# Altium PCB PCB1.PcbDoc (part 1 of 2)
Units mm, origin at the board's own origin, x right, y up, seen from the top; angles counter-clockwise.
Board outline 42.67 x 97.28 mm, 2 copper layers (Top Layer, Bottom Layer); 89 components, 66 nets, 314 pads, 101 vias.
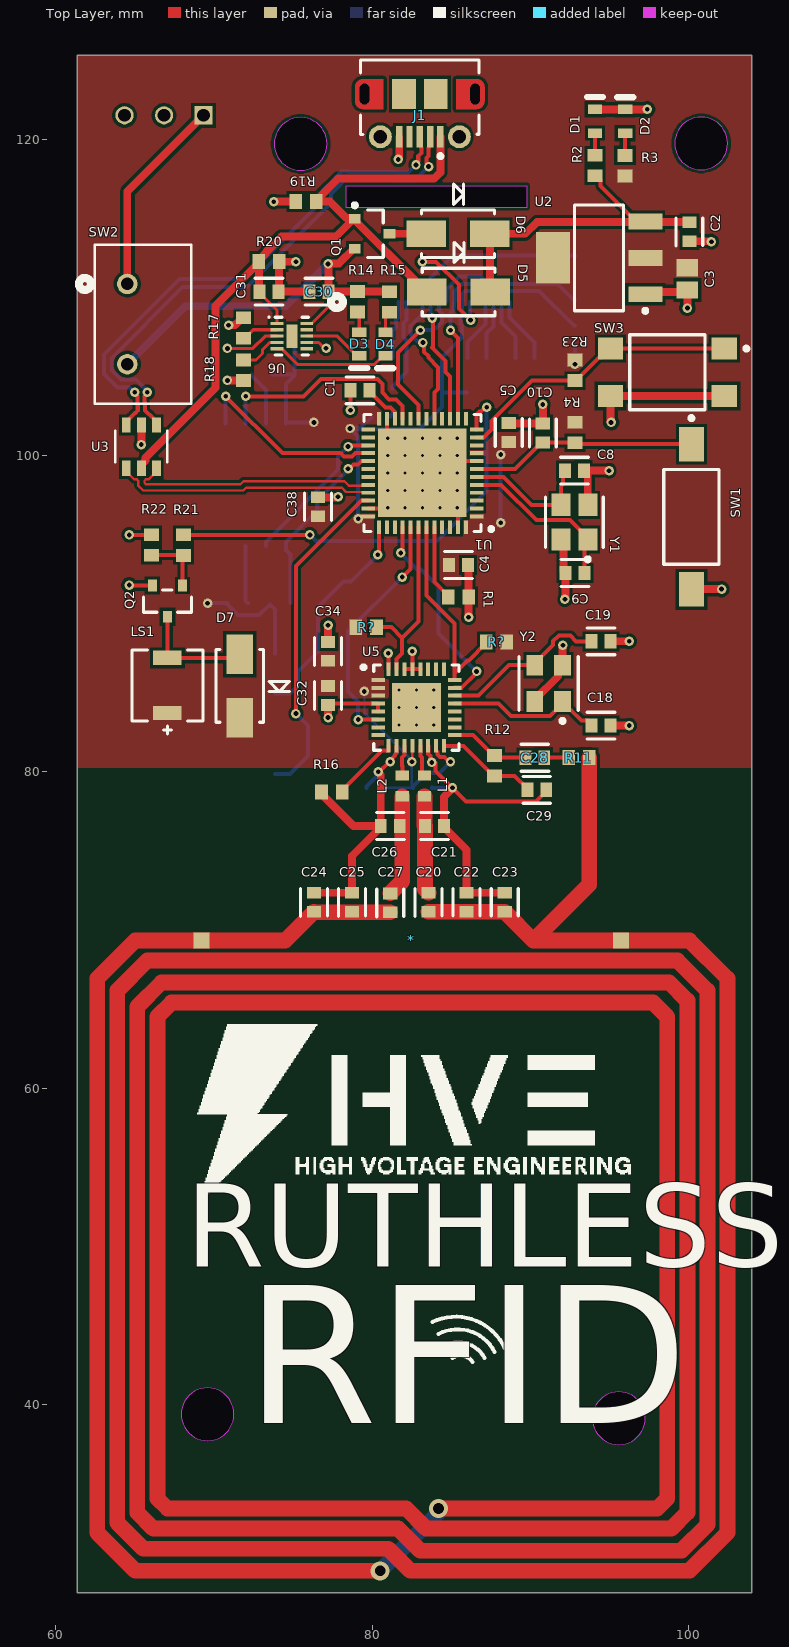
[diagram p0: Top Layer view]
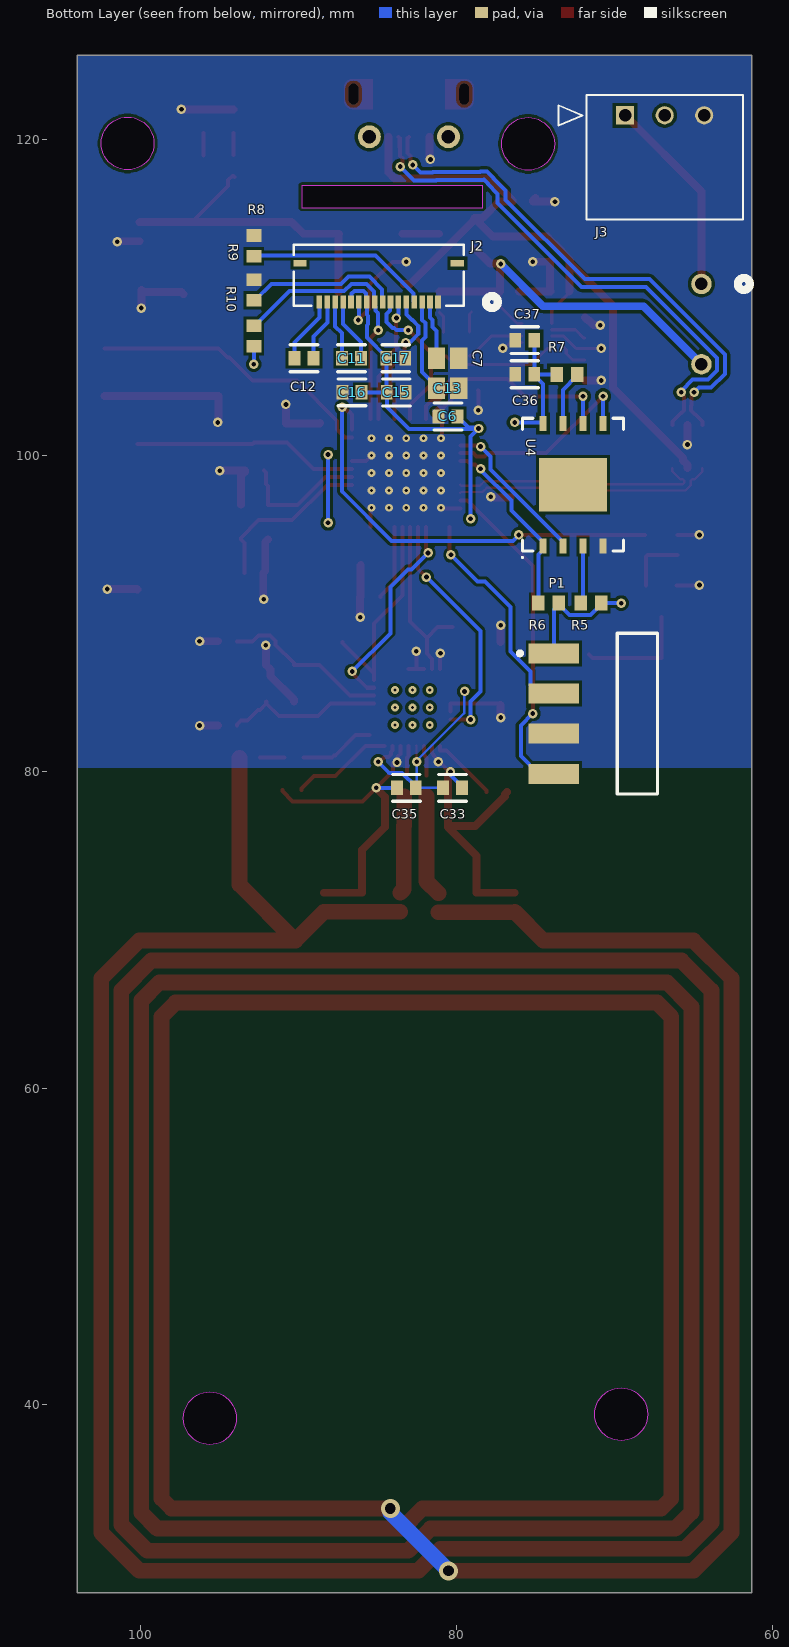
[diagram p1: Bottom Layer view, seen from below]
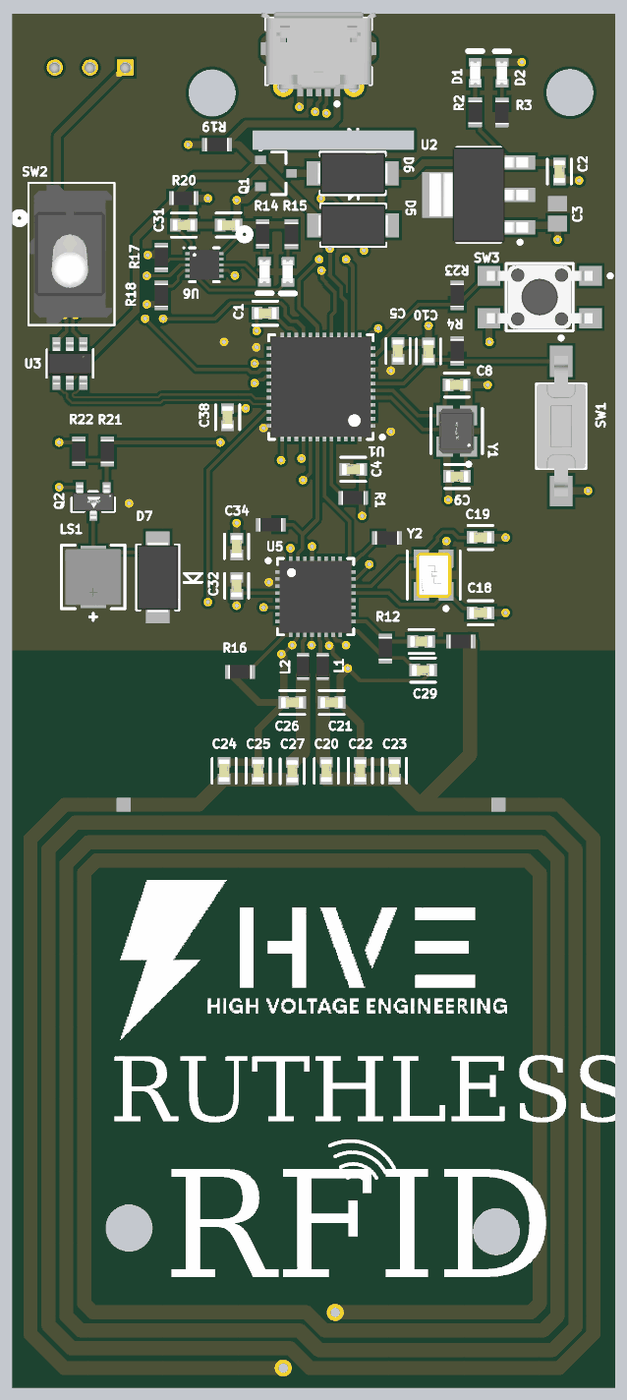
[diagram p2: 3D render of the assembled board from above, using the file's embedded part models]
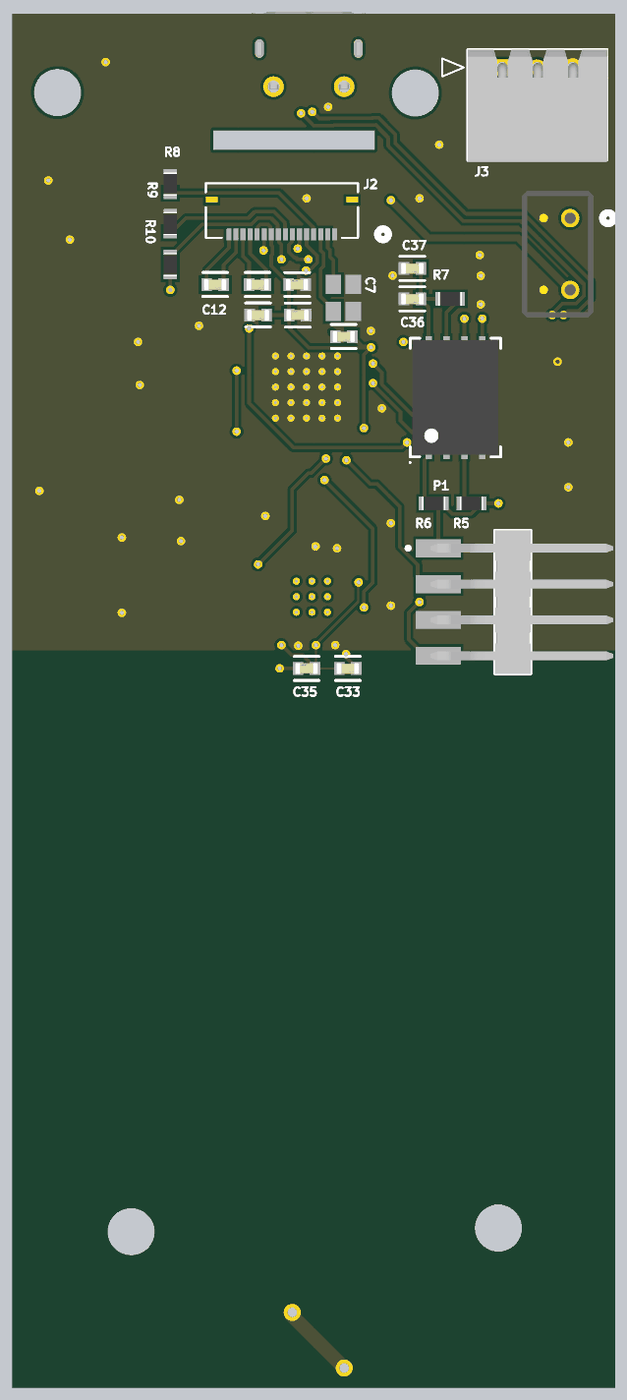
[diagram p3: 3D render of the assembled board from below, using the file's embedded part models]

## Layer stack, top to bottom
Top Solder: solder mask 0.0102, Solder Resist, Dk 3.5
Top Layer: signal copper 0.0356
Dielectric 1: dielectric 0.32, FR-4, Dk 4.8
Bottom Layer: signal copper 0.0356
Bottom Solder: solder mask 0.0102, Solder Resist, Dk 3.5

## Board outline
61.341,28.064 61.341,125.349 104.013,125.349 104.013,28.064
cut-out: 99.148,119.761 ccw(c100.819,119.761) 100.819,118.091 ccw(c100.819,119.761) 102.489,119.761 ccw(c100.819,119.761) 100.819,121.431 ccw(c100.819,119.761)
cut-out: 73.811,119.732 ccw(c75.482,119.732) 75.482,118.061 ccw(c75.482,119.732) 77.152,119.732 ccw(c75.482,119.732) 75.482,121.402 ccw(c75.482,119.732)
cut-out: 67.926,39.37 ccw(c69.596,39.37) 69.596,37.7 ccw(c69.596,39.37) 71.266,39.37 ccw(c69.596,39.37) 69.596,41.04 ccw(c69.596,39.37)
cut-out: 93.941,39.116 ccw(c95.612,39.116) 95.612,37.446 ccw(c95.612,39.116) 97.282,39.116 ccw(c95.612,39.116) 95.612,40.786 ccw(c95.612,39.116)
cut-out: 78.359,115.697 78.359,117.094 89.789,117.094 89.789,115.697

## Design rules (kind name [scope] priority, off if disabled: settings)
Clearance [All] p1: gap=0.2 ignorepadtopadclearanceinfootprint=FALSE except(0: Arc-Hole Track-Hole SMDPad-Hole THPad-Hole Via-Hole Fill-Hole Poly-Hole Region-Hole Text-Hole; 0.1: SMDPad-SMDPad; 0.15: Arc-SMDPad Track-SMDPad)
DiffPairsRouting [All] p1: maxlimit=0.254 minlimit=0.1 mostfreqgap=0.254 toplayer_minwidth=0.1 toplayer_maxwidth=0.381 toplayer_prefwidth=0.254 bottomlayer_minwidth=0.1 bottomlayer_maxwidth=0.381 bottomlayer_prefwidth=0.254 maxuncoupledlength=12.7
MinimumSolderMaskSliver [All] p1: minsoldermaskwidth=0.1
PlaneConnect [All] p1: planeconnectstyle=Direct reliefexpansion=0.508 reliefentries=4 reliefconductorwidth=0.254 reliefairgap=0.254
PolygonConnect [All] p1: connectstyle=Direct reliefconductorwidth=0.254 reliefentries=4 polygonreliefangle="90 Angle" airgapwidth=0.254
RoutingVias [All] p1: holewidth=0.3 width=0.6 viastyle="Through Hole" minholewidth=0.3 minwidth=0.6 maxholewidth=0.3 maxwidth=0.6
SilkToSolderMaskClearance [IsPad] p1: minsilkscreentomaskgap=0.1 clearancetoexposedcopper=TRUE
SolderMaskExpansion [All] p1: expansion=0 istentingtop=FALSE
Width [All] p1: maxlimit=10 minlimit=0.15 preferedwidth=0.254 minimp=50.000000 maximp=50.000000 favimp=50.000000
26 further rules are at their usual default settings.

## Classes and differential pairs
component class "RFID Sheet2": * C18 C19 C20 C21 C22 C23 C24 C25 C26 C27 C28 C29 C30 C31 C32 C33 C34 C35 D3 D4 D5 D6 D7 L1 L2 LS1 Q1 Q2 R11 R12 R14 R15 R16 R17 R18 R19 R20 R21 R22 R? U5 U6 Y2
component class "RFID Sheet 1": C1 C2 C3 C4 C5 C6 C7 C8 C9 C10 C11 C12 C13 C15 C16 C17 C36 C37 C38 D1 D2 J1 J2 J3 P1 R1 R2 R3 R4 R5 R6 R7 R8 R9 R10 R23 SW1 SW2 SW3 U1 U2 U3 U4 Y1
differential pair USB: +USB_P -USB_N
differential pair USB_CONN: +USB_CONN_P -USB_CONN_N

## Components (designator, comment, footprint, x,y, rotation, side; value= is the part's Value field where it differs from the comment)
* "RFID COIL" PCBComponent_1 82.55,49.403 r270 top
C1 "2.2u" FP-C0603C-CF-MFG 79.248,104.14 r180 top value="0.10 μF"
C2 "0.1u" FP-C0603C-CF-MFG 100.076,114.173 r270 top value="0.10 μF"
C3 "10u" CAPC2013X88X50LL20T25 99.949,111.19 r90 top
C4 "0.1u" FP-C0603C-CF-MFG 85.471,93.091 r0 top value="0.10 μF"
C5 "0.1u" FP-C0603C-CF-MFG 88.646,101.473 r90 top value="0.10 μF"
C6 "0.1u" FP-C0603C-CF-MFG 80.553,102.489 r0 bottom value="0.10 μF"
C7 "10u" CAPC2013X88X50LL20T25 80.58,106.172 r0 bottom
C8 "26p" FP-C0603C-CF-MFG 92.802,99.06 r0 top value="0.10 μF"
C9 "26p" FP-C0603C-CF-MFG 92.837,92.583 r180 top value="0.10 μF"
C10 "0.1u" FP-C0603C-CF-MFG 90.805,101.438 r90 top value="0.10 μF"
C11 "1u" FP-C0603C-CF-MFG 86.649,106.172 r0 bottom value="0.10 μF"
C12 "1u" FP-C0603C-CF-MFG 89.662,106.172 r0 bottom value="0.10 μF"
C13 "10u" CAPC2013X88X50LL20T25 80.58,104.267 r0 bottom
C15 "0.1u" FP-C0603C-CF-MFG 83.82,104.013 r180 bottom value="0.10 μF"
C16 "0.1u" FP-C0603C-CF-MFG 86.614,104.013 r0 bottom value="0.10 μF"
C17 "0.1u" FP-C0603C-CF-MFG 83.855,106.172 r180 bottom value="0.10 μF"
C18 "31p" FP-C0603C-CF-MFG 94.488,82.931 r0 top value="0.10 μF"
C19 "31p" FP-C0603C-CF-MFG 94.488,88.265 r0 top value="0.10 μF"
C20 "15p" FP-C0603C-CF-MFG 83.566,71.755 r270 top value="0.10 μF"
C21 "47p" FP-C0603C-CF-MFG 83.947,76.581 r0 top value="0.10 μF"
C22 "180p" FP-C0603C-CF-MFG 85.979,71.755 r90 top value="0.10 μF"
C23 "10p" FP-C0603C-CF-MFG 88.392,71.755 r90 top value="0.10 μF"
C24 "180p" FP-C0603C-CF-MFG 76.327,71.755 r270 top value="0.10 μF"
C25 "10p" FP-C0603C-CF-MFG 78.74,71.755 r270 top value="0.10 μF"
C26 "47p" FP-C0603C-CF-MFG 81.153,76.581 r0 top value="0.10 μF"
C27 "15p" FP-C0603C-CF-MFG 81.153,71.72 r270 top value="0.10 μF"
C28 "0.1u" FP-C0603C-CF-MFG 90.297,80.899 r0 top value="0.10 μF"
C29 "0.1u" FP-C0603C-CF-MFG 90.424,78.867 r180 top value="0.10 μF"
C30 "1u" FP-C0603C-CF-MFG 76.652,110.382 r180 top value="0.10 μF"
C31 "1u" FP-C0603C-CF-MFG 73.477,110.382 r0 top value="0.10 μF"
C32 "0.1u" FP-C0603C-CF-MFG 77.216,84.836 r90 top value="0.10 μF"
C33 "0.1u" FP-C0603C-CF-MFG 80.264,78.994 r0 bottom value="0.10 μF"
C34 "0.1u" FP-C0603C-CF-MFG 77.216,87.63 r270 top value="0.10 μF"
C35 "0.1u" FP-C0603C-CF-MFG 83.185,78.994 r180 bottom value="0.10 μF"
C36 "0.1u" FP-C0603C-CF-MFG 75.692,105.156 r0 bottom value="0.10 μF"
C37 "0.1u" FP-C0603C-CF-MFG 75.692,107.315 r0 bottom value="0.10 μF"
C38 "0.1u" FP-C0603C-CF-MFG 76.581,96.774 r90 top value="0.10 μF"
D1 "0603 LED" "0603 LED" 94.107,121.17 r90 top
D2 "0603 LED" "0603 LED" 96.012,121.158 r90 top
D3 "0603 LED" "0603 LED" 79.192,107.08 r270 top
D4 "0603 LED" "0603 LED" 80.843,107.068 r270 top
D5 "B260A-13-F" DIOD-SMA-2_V 85.471,110.363 r0 top
D6 "B260A-13-F" DIOD-SMA-2_V 85.439,114.046 r0 top
D7 "B260A-13-F" DIOD-SMA-2_V 71.628,85.439 r270 top
J1 "105017-0001" USB-MICRO-B_V 83.024,121.532 r180 top
J2 "16 pin 0.5mm pitch FPC" CONN16_046809616210846+_AVX 81.185,109.728 r0 bottom
J3 "22057035" CON_22057035_MOL 69.342,121.539 r180 bottom
L1 "2.2u" INDC1608X90X30LL10T20 83.312,79.121 r270 top
L2 "2.2u" INDC1608X90X30LL10T20 81.915,79.121 r270 top
LS1 "SMT-0440-S-R" FP-SMT-0440-S-R-MFG 67.056,85.471 r270 top
P1 "TSM-104-01-T-SH" SMTC-TSM-104-01-X-SH 68.453,83.693 r270 bottom
Q1 "BSS308PE" INF-PG-SOT23_L 80.01,114.046 r0 top
Q2 "SQ2364EES-T1_GE3" FP-S-03946-MFG 67.056,90.805 r270 top
R1 "10k" RESC1609X50X30NL8T20 85.471,91.059 r0 top
R2 "520" RESC1609X50X30NL8T20 94.107,118.364 r270 top
R3 "100" RESC1609X50X30NL8T20 96.012,118.349 r270 top
R4 "10k" RESC1609X50X30NL8T20 92.837,101.473 r270 top
R5 "10k" RESC1609X50X30NL8T20 71.501,90.678 r180 bottom
R6 "4.7k" RESC1609X50X30NL8T20 74.183,90.678 r180 bottom
R7 "10k" RESC1609X50X30NL8T20 73.025,105.156 r0 bottom
R8 "680k" RESC1609X50X30NL8T20 92.837,113.284 r90 bottom
R9 "5.1k" RESC1609X50X30NL8T20 92.837,110.49 r90 bottom
R10 "4.7k" RESC1609X50X30NL8T20 92.837,107.584 r270 bottom
R11 "5.1k" RESC1609X50X30NL8T20 93.091,80.899 r0 top
R12 "820" RESC1609X50X30NL8T20 87.757,80.391 r90 top
R14 "1k5" RESC1609X50X30NL8T20 79.065,109.747 r90 top
R15 "1k5" RESC1609X50X30NL8T20 81.097,109.732 r90 top
R16 "10k" RESC1609X50X30NL8T20 77.455,78.74 r0 top
R17 "1k3" RESC1609X50X30NL8T20 71.882,108.092 r270 top
R18 "2k" RESC1609X50X30NL8T20 71.882,105.41 r90 top
R19 "10k" RESC1609X50X30NL8T20 75.819,116.078 r0 top
R20 "10k" RESC1609X50X30NL8T20 73.477,112.287 r180 top
R21 "10" RESC1609X50X30NL8T20 68.072,94.346 r90 top
R22 "10k" RESC1609X50X30NL8T20 66.04,94.361 r270 top
R23 "10k" RESC1609X50X30NL8T20 92.837,105.41 r90 top
R? "10k" RESC1609X50X30NL8T20 87.866,88.224 r0 top
R? "10k" RESC1609X50X30NL8T20 79.629,89.154 r180 top
SW1 "FSMSMTR" TECO-FSMSMTR_V 100.203,96.139 r270 top
SW2 "A11JP" A11JP_NKK 64.516,110.871 r0 top
SW3 "TL3305AF260QG" FP-TL3305AF260QG-MFG 98.679,105.283 r180 top
U1 "STM32F401CBU6TR" "UQFN48 P0.5mm" 83.189,98.913 r180 top
U2 "LD1117S33TR" SOT230P700X180-4N 94.361,112.522 r180 top
U3 "USBLC6-2SC6" SOT23-6L_STM 65.405,100.584 r270 top
U4 "W25N01GVZEIG TR" "WSON 8mmx6mm 1.27P" 72.644,98.171 r90 bottom
U5 "MFRC52201HN1,157" "32QFN P0.5" 82.804,84.074 r0 top
U6 "BQ24040DSQR" SON40P200X80_HS-11N 74.93,107.569 r0 top
Y1 "ABM8G-16.000MHZ-18-D2Y-T" FP-ABM8G-MFG 92.798,95.801 r90 top
Y2 "ABM8-27.120MHZ-B4-T" FP-ABM8-MFG 91.172,85.605 r90 top

## Footprints (in the part's own frame and the unit in brackets; to place one, negate y for a bottom-side part, rotate by r counter-clockwise, add the part's x,y. Pads: shape width x height; smd on the part's side, far side on the other; paste and mask are expansions set on the pad)
"32QFN P0.5" [mm] "QFN, 32-Leads, Body 5.00x5.00mm, Pitch 0.50mm, Thermal Pad 3.10x3.10mm, IPC Medium Density"
  rect 0.85x0.25 smd: 1(-2.425,1.75) 2(-2.425,1.25) 3(-2.425,0.75) 4(-2.425,0.25) 5(-2.425,-0.25) 6(-2.425,-0.75) 7(-2.425,-1.25) 8(-2.425,-1.75) 17(2.425,-1.75) 18(2.425,-1.25) 19(2.425,-0.75) 20(2.425,-0.25) 21(2.425,0.25) 22(2.425,0.75) 23(2.425,1.25) 24(2.425,1.75)
  rect 0.25x0.85 smd: 9(-1.75,-2.425) 10(-1.25,-2.425) 11(-0.75,-2.425) 12(-0.25,-2.425) 13(0.25,-2.425) 14(0.75,-2.425) 15(1.25,-2.425) 16(1.75,-2.425) 25(1.75,2.425) 26(1.25,2.425) 27(0.75,2.425) 28(0.25,2.425) 29(-0.25,2.425) 30(-0.75,2.425) 31(-1.25,2.425) 32(-1.75,2.425)
  rect 3.1x3.1 smd: 33(0,0)
  silkscreen extent -3.47,-2.7 2.7,2.7, body extent -2.55,-2.55 2.55,2.55, height 1
"0603 LED" [mm]
  rect 0.6x0.9 smd: 1(-0.75,0) 2(0.75,0)
  silkscreen extent 1.52,-0.51 1.52,0.51, body extent -0.84,-0.37 0.81,0.36, height 0.68
A11JP_NKK [mil]
  round 51 / inner round 60 / far side round 51 hole 31 paste-99999 mask+0: 1(0,0) 3(0,-200)
  silkscreen extent -121,-298 159,98, body extent -77,-293 153,93, height 719
CAPC2013X88X50LL20T25 [mm] "Chip Capacitor, 2-Leads, Body 2.00x1.25mm, IPC High Density"
  rect 1.1x1.35 smd: 1(-0.7,0) 2(0.7,0)
  body extent -1.1,-0.72 1.1,0.72, height 0.88
CON_22057035_MOL [mm]
  rect 1.15x1.15 / inner round 1.524 / far side rect 1.15x1.15 hole 0.8 paste-2539.97 mask+0.076: 1(0,0)
  round 1.15 / inner round 1.524 / far side round 1.15 hole 0.8 paste-2539.97 mask+0.076: 2(2.5,0) 3(5,0)
  silkscreen extent -4.23,-6.6 7.45,1.3, body extent -2.41,-6.63 7.49,1.27, height 4.99
CONN16_046809616210846+_AVX [mil]
  rect 14x33 smd paste+0 mask+0: 1(0,0) 2(19.69,0) 3(39.37,0) 4(59.06,0) 5(78.74,0) 6(98.43,0) 7(118.11,0) 8(137.8,0) 9(157.48,0) 10(177.17,0) 11(196.85,0) 12(216.54,0) 13(236.22,0) 14(255.91,0) 15(275.59,0) 16(295.28,0)
  rect 33x16 smd paste-16.5 mask+0: 17(-48.23,-96.46) 18(343.5,-96.46)
  silkscreen extent -149,-142 360,15
DIOD-SMA-2_V [mm]
  rect 2.5x1.7 smd: 1(-2,0) 2(2,0)
  silkscreen extent -2.3,-1.5 2.3,3.14, body extent -2.52,-1.46 2.52,1.46, height 2.4
FP-ABM8-MFG [mm]
  rect 1.3x1.05 smd paste+0 mask+0: 1(-1.15,-0.875) 2(1.15,-0.875) 3(1.15,0.875) 4(-1.15,0.875)
  silkscreen extent -2.5,-1.88 1.7,1.88, body extent -1.9,-1.5 1.9,1.5, height 0.25
FP-ABM8G-MFG [mm]
  rect 1.4x1.2 smd paste+0 mask+0: 1(-1.1,-0.85) 2(1.1,-0.85) 3(1.1,0.85) 4(-1.1,0.85)
  silkscreen extent -2.47,-1.83 1.6,1.83, body extent -1.9,-1.55 1.9,1.55, height 0.25
FP-C0603C-CF-MFG [mm]
  rect 0.75x0.9 smd paste+0 mask+0: 1(-0.6,0) 2(0.6,0)
  silkscreen extent -0.87,-0.85 0.88,0.85, body extent -1.2,-0.6 1.2,0.6, height 0.25
FP-S-03946-MFG [mil]
  rect 29x22 smd paste+0 mask+0: 1(-39,37.5) 2(-39,-37.5) 3(39,0)
  silkscreen extent -28,-60 28,60, body extent -57,-64 57,64, height 10
FP-SMT-0440-S-R-MFG [mm]
  rect 0.9x1.8 smd paste+0 mask+0: 1(-1.75,0) 2(1.75,0)
  silkscreen extent -2.25,-2.25 3.08,2.25, body extent -2.35,-2.35 2.35,2.35, height 0.25
FP-TL3305AF260QG-MFG [mm]
  rect 1.6x1.4 smd paste+0 mask+0: 1(-3.6,-1.5) 2(3.6,-1.5) 3(-3.6,1.5) 4(3.6,1.5)
  silkscreen extent -5.13,-2.37 2.37,2.37, body extent -4.5,-2.47 4.5,2.47, height 0.25
INDC1608X90X30LL10T20 [mm] "Chip Inductor, 2-Leads, Body 1.7x0.9mm, IPC High Density"
  rect 0.64x0.84 smd: 1(-0.66,0) 2(0.66,0)
  body extent -0.85,-0.45 0.85,0.45, height 0.9
INF-PG-SOT23_L [mm] "SOT23, 3-Leads, Body 2.9x1.3mm, Pitch 0.95mm, IPC High Density"
  rect 0.75x0.6 smd: 1(-1.1,0.95) 2(-1.1,-0.95) 3(1.1,0)
  silkscreen extent -1.22,-1.5 0.7,1.92, body extent -0.7,-1.5 0.7,1.5, height 1.1
PCBComponent_1 [mm]
  rect 1x1 smd mask-1: 1(-19.939,13.208) 2(-19.939,-13.335)
  Top Layer lines w1: -19.939,-13.335 -19.939,-17.526 -17.526,-19.939 0,-19.939 17.526,-19.939 19.939,-17.526 19.939,-2.032 ; 16.002,1.651 16.002,15.494 15.367,16.129 -15.113,16.129 -16.002,15.24 -16.002,-15.24 -15.113,-16.129 15.367,-16.129 16.002,-15.494 16.002,-0.381 17.272,0.889 17.272,1.397 17.272,16.383 16.256,17.399 -16.129,17.399 -17.272,16.256 -17.272,-15.875 -15.748,-17.399 16.256,-17.399 17.272,-16.383 17.272,-0.889 18.669,0.508 18.669,17.018 17.018,18.669 -16.764,18.669 -18.669,16.764 -18.669,-16.764 -16.764,-18.669 16.891,-18.669 18.542,-17.018 18.542,-1.524 19.939,-0.127 19.939,0 19.939,17.526 17.526,19.939 0,19.939 -17.526,19.939 -19.939,17.526 -19.939,13.208
  Bottom Layer lines w1: 19.939,-2.032 16.256,1.651 16.002,1.651
RESC1609X50X30NL8T20 [mm] "Chip Resistor, 2-Leads, Body 1.65x0.95mm, IPC Medium Density"
  rect 0.8x0.95 smd: 1(-0.65,0) 2(0.65,0)
  body extent -0.82,-0.48 0.82,0.48, height 0.5
SMTC-TSM-104-01-X-SH [mm] "Terminal Strip Single Surface Mount, 1x4 Pins, Horizontal, 2.54mm Pitch, Male"
  rect 1.27x3.18 smd: 1(-3.81,-5.402) 2(-1.27,-5.402) 3(1.27,-5.402) 4(3.81,-5.402)
  silkscreen extent -5.08,-7.67 5.08,1.15, body extent -5.08,-5.96 5.08,6.99, height 3.05
SON40P200X80_HS-11N [mm] "SON, 10-Leads, Body 2.00x2.00mm, Pitch 0.40mm, Thermal Pad 1.50x0.69mm, IPC Medium Density"
  rect 0.8x0.2 smd: 1(-0.945,0.8) 2(-0.945,0.4) 3(-0.945,0) 4(-0.945,-0.4) 5(-0.945,-0.8) 6(0.945,-0.8) 7(0.945,-0.4) 8(0.945,0) 9(0.945,0.4) 10(0.945,0.8)
  rect 0.69x1.5 smd: 11(0,0)
  silkscreen extent -1.5,-1.2 1.05,1.25, body extent -1.05,-1.05 1.05,1.05, height 0.8
SOT23-6L_STM [mil]
  rect 38.5x22 smd paste+0 mask+0: 1(-53.75,37.4) 2(-53.75,0) 3(-53.75,-37.4) 4(53.75,-37.4) 5(53.75,0) 6(53.75,37.4)
  silkscreen extent -40,-65 40,65, body extent -59,-60 59,60, height 57
SOT230P700X180-4N [mm] "SOT223, 4-Leads, Body 6.50x7.00mm (avg), Pitch 2.30mm, IPC Medium Density"
  rect 2.15x1 smd: 1(-2.925,2.3) 2(-2.925,0) 3(-2.925,-2.3)
  rect 2.15x3.25 smd: 4(2.925,0)
  silkscreen extent -3.05,-3.35 1.55,3.47, body extent -3.5,-3.35 3.5,3.35, height 1.8
TECO-FSMSMTR_V [mm] "SMD, 2-Leads, Body 6x3.5mm, Pitch 9.19mm"
  rect 2.2x1.6 smd: 1(-4.595,0)
  rect 2.18x1.6 smd: 2(4.595,0)
  silkscreen extent -6.37,-1.75 3,1.75, body extent -4.98,-1.75 4.98,1.75, height 4.4
"UQFN48 P0.5mm" [mm] "QFN, 48-Leads, Body 7.00x7.00mm, Pitch 0.50mm, Thermal Pad 5.60x5.60mm, IPC Medium Density"
  rect 0.85x0.25 smd: 1(-3.425,2.75) 2(-3.425,2.25) 3(-3.425,1.75) 4(-3.425,1.25) 5(-3.425,0.75) 6(-3.425,0.25) 7(-3.425,-0.25) 8(-3.425,-0.75) 9(-3.425,-1.25) 10(-3.425,-1.75) 11(-3.425,-2.25) 12(-3.425,-2.75) 25(3.425,-2.75) 26(3.425,-2.25) 27(3.425,-1.75) 28(3.425,-1.25) 29(3.425,-0.75) 30(3.425,-0.25) 31(3.425,0.25) 32(3.425,0.75) 33(3.425,1.25) 34(3.425,1.75) 35(3.425,2.25) 36(3.425,2.75)
  rect 0.25x0.85 smd: 13(-2.75,-3.425) 14(-2.25,-3.425) 15(-1.75,-3.425) 16(-1.25,-3.425) 17(-0.75,-3.425) 18(-0.25,-3.425) 19(0.25,-3.425) 20(0.75,-3.425) 21(1.25,-3.425) 22(1.75,-3.425) 23(2.25,-3.425) 24(2.75,-3.425) 37(2.75,3.425) 38(2.25,3.425) 39(1.75,3.425) 40(1.25,3.425) 41(0.75,3.425) 42(0.25,3.425) 43(-0.25,3.425) 44(-0.75,3.425) 45(-1.25,3.425) 46(-1.75,3.425) 47(-2.25,3.425) 48(-2.75,3.425)
  rect 5.6x5.6 smd: 49(0,0)
  silkscreen extent -4.47,-3.7 3.7,3.7, body extent -3.6,-3.6 3.6,3.6, height 0.6
USB-MICRO-B_V [mm] "USB, MICRO B, Body 7.491x4.695 mm, Pitch 0.65 mm"
  rect 0.4x1.35 smd: 1(-1.3,1.35) 2(-0.65,1.35) 3(0,1.35) 4(0.65,1.35) 5(1.3,1.35)
  round 1.45 hole 0.85: 6(-2.5,1.35) 7(2.5,1.35)
  rrect50% 0x0 hole 0.6 slot 1.3 at 90 deg: 8(-3.5,-1.35) 11(3.5,-1.35)
  rect 1.5x1.9 smd: 9(-1,-1.35) 10(1,-1.35)
  Top Layer circle w0.5: c3.6,-0.9 r0.25
  Top Layer circle w0.5: c3.6,-1.8 r0.25
  Top Layer circle w0.5: c-3.6,-0.9 r0.25
  Top Layer circle w0.5: c-3.6,-1.8 r0.25
  Top Layer region: -2.3,-2.3 -2.3,-0.4 -3.6,-0.4 -3.6,-2.3
  Top Layer region: 2.3,-0.4 2.3,-2.3 3.6,-2.3 3.6,-0.4
  Top Layer region: 3.6,-0.9 3.6,-1.8 4.1,-1.8 4.1,-0.9
  Top Layer region: -3.6,-1.8 -3.6,-0.9 -4.1,-0.9 -4.1,-1.8
  silkscreen extent -3.75,-3.5 3.75,2.7, body extent -4.1,-3.9 4.1,1.5, height 2.67
"WSON 8mmx6mm 1.27P" [mm] "SON, 8-Leads, Body 6.00x8.00mm, Pitch 1.27mm, Thermal Pad 4.30x3.40mm, IPC Medium Density"
  rect 0.95x0.45 smd: 1(-3.87,1.905) 2(-3.87,0.635) 3(-3.87,-0.635) 4(-3.87,-1.905) 5(3.87,-1.905) 6(3.87,-0.635) 7(3.87,0.635) 8(3.87,1.905)
  rect 3.4x4.3 smd paste-1.7: 9(0,0)
  silkscreen extent -4.65,-3.2 4.2,3.25, body extent -4.05,-3.05 4.05,3.05, height 0.8

## Part data
C1 C2 C4 C5 C6 C8 C9 C10 C11 C12 C15 C16 C17 C18 C19 C20 C21 C22 C23 C24 C25 C26 C27 C28 C29 C30 C31 C32 C33 C34 C35 C36 C37 C38: library part CMP-2006-03061-2, "CAP CER 0.1UF 50V X7R 0603", Capacitance="0.10 μF", Manufacturer=KEMET, Manufacturer Part Number=C0603C104K5RACTU, Package=C0603C-CF, Temperature="-55°C to +125°C", Temperature Characteristic=X7R, Temperature Coefficient=30ppm/°C, Temperature Range High=+125°C, Temperature Range Low=-55°C, Tolerance=0.1, Voltage Rating="50 V", Automotive=Yes, Automotive Grade="Grade 1", Category=Cap, ComponentLink2Description=Datasheet, ComponentLink2URL=https://api.kemet.com/component-edge/download/datasheet/C0603C100J5GACAUTO.pdf, Device Class L1="Passive Components", Device Class L2=Capacitors, Device Class L3="Ceramic Capacitors", Digikey Description="CAP CER 0.1UF 50V X7R 0603", Height=0.87mm, Lead Free=Yes, Material=Ceramic, Octopart=https://octopart.com/c0603c104k5ractu-kemet-139244, RoHS=TRUE
C3 C7 C13: library part CMP-2007-00266-1, Manufacturer=Kemet, Part Number=C0805C103K5RACTU
D5 D6 D7: library part CMP-2000-04933-1, "Schottky Barrier Rectifier, 60 V, 2 A, -65 to 150 degC, 2-Pin SMA, RoHS, Tape and Reel", If - Forward Current=2A, Ifsm - Forward Surge Current=50A, Ir - Reverse Current=500uA, Manufacturer=DiodesIncorporated, Maximum Operating Temperature=+150C, Minimum Operating Temperature=-65C, Operating Temperature Range=-65Cto+150C, Package / Case=SMA, Package Description="2-Pin Surface Mounted Assembly, Body 4.3 x 2.605 mm, Height 2.4 mm", Package Reference=SMA-2, Vf - Forward Voltage=0.7V, Vrrm - Repetitive Reverse Voltage=60V, Brand=DiodesIncorporated, Configuration=Single, Datasheet URL=http://www.diodes.com/_files/datasheets/ds13004.pdf, Datasheet Version="Rev. 22-2, 07/2015", Factory Pack Quantity=5000, Height=2.1mm, Length=4.6mm, Manufacturer URL=http://www.diodes.com/, Mounting Style=SMD/SMT, Packaging=Reel, Product=SchottkyDiodes, Product Category=SchottkyDiodes&Rectifiers, RoHS=True, Series=B260, Technology=Si, Termination Style=SMD/SMT, Type=SchottkyBarrierRectifier, Unit Weight=0.002258oz, Width=2.92mm
J1: library part CMP-2000-05827-1, "Micro-USB B Receptacle, Right Angle, Bottom Mount, Surface Mount, with Solder Tabs, -30 to 85 degC, 5-Pin USB, RoHS, Tape and Reel", Manufacturer=Molex, Package Description="5-Leads USB, Micro B, Body 7.5 x 5 mm, Pitch 0.65 mm", Package Reference=MICRO-B, Package Version="Rev. F, 12/2012", Standard Package=1, Voltage - Max=30V, 3D Model=105017-0001.stp, Catalog Drawings=1050170001, Category=Connectors,Interconnects, Circuits=5, Connector Type=USB-microB, Datasheet URL=http://www.molex.com/elqNow/elqRedir.htm?ref=http://www.molex.com/webdocs/datasheets/pdf/en-us/1050170001_IO_CONNECTORS.pdf, Datasheet Version=03/2016, Family=USB,DVI,HDMIConnectors, Featured Product=Micro-USBConnectorsUSBConnectors, Features=Shielded,SolderRetention, Gender=Receptacle, Ingress Protection=-, Manufacturer URL=http://www.molex.com/, Mating Products=WM17145-ND-CABLEMICROUSBBTOSTDA1.0MWM17147-ND-CABLEMICROUSBBTOSTDA2.0MWM17146-ND-CABLEMICROUSBBTOSTDA1.5M, Mounting Technology=SurfaceMount, Mounting Type=BoardCutout,SurfaceMount,RightAngle, Number of Contacts=5, Online Catalog=Molex-MicroUSB, Other Names=WM1399DKR, Package URL=http://www.molex.com/pdm_docs/sd/1050170001_sd.pdf, Packaging=Digi-Reel®, PCN Assembly/Origin=ResinSupplier21/Oct/2015, RoHS Information=1050170001CertofCompliance, Series=-, Specifications=-
J3: "No Description Available", Mfr_Name="Molex Connector Corporation", Copyright="Copyright (C) 2024 Ultra Librarian. All rights reserved.", Manufacturer_Part_Number=22057035, RefDes=RefDes, Type=DEV
L1 L2: library part CMP-2000-05913-1, "Unshielded Wirewound Inductor, 33 nH, 350 mA, -55 to 150 degC, 0603 (1608 Metric), RoHS, Tape and Reel", Current - Saturation=-, Current Rating=350mA, DC Resistance (DCR)=600mOhmMax, Frequency - Self Resonant=3GHz, Frequency - Test=100MHz, Inductance=33nH, Manufacturer=EPCOS-(TDK), Package / Case=0603(1608Metric), Package Description="2-Pin Surface Mount Device, Body 1.6 x 0.8 mm", Package Reference=0603, Q @ Freq=14@100MHz, Ratings=AEC-Q200, Tolerance=±5%, Category=Inductors,Coils,Chokes, Datasheet URL=https://en.tdk.eu/inf/30/db/ind_2008/b82496c.pdf, Datasheet Version=07/2016, Family=FixedInductors, Height - Seated (Max)="0.035\"(0.90mm)", Manufacturer URL=http://www.tdk.com/, Material - Core=Ceramic, Mounting Technology=SurfaceMount, Mounting Type=SurfaceMount, Operating Temperature=-, Packaging=CutTape(CT), Series=SIMID, Shielding=Unshielded, Size / Dimension="0.063\"Lx0.031\"W(1.60mmx0.80mm)", Type=Wirewound
LS1: library part CMP-103888-000001-1, "AUDIO MAGNETIC XDCR 2-4V SMD", Frequency=4kHz, Max Operating Temperature=70°C, Min Operating Temperature=-20°C, Operating Supply Current=90mA, Voltage Rating=3V, Length=4mm, Mount="Surface Mount", Packaging="Tape and Reel", Sensing Method=Magnetic, Termination=Solder, Width=4mm
P1: library part CMP-1024-00223-1, "0.025\" SQ Post Header, Surface Mount, Horizontal, -55 to 105 degC, 2.54 mm Pitch, 4-Pin, Male, RoHS", Manufacturer=Samtec, Temperature Range="-55 to 105 degC", ComponentLink1Description="Manufacturer URL", ComponentLink1URL=http://www.samtec.com, ComponentLink2Description=Datasheet, ComponentLink2URL=http://www.samtec.com/documents/webfiles/pdf/TSM.PDF, ComponentLink3Description="Package Specification", ComponentLink3URL=http://www.samtec.com/documents/webfiles/cpdf/TSM-1XX-XX-XXX-SH-XX-XXX-XX-MKT1.pdf, DatasheetVersion=F-214, Mounting Technology="Surface Mount", Orientation=Horizontal, PackageDescription="Terminal Strip Single Surface Mount", PackageReference=TSM-104-01-X-SH, PackageVersion="CD, 7/1991", PartNumber=TSM-104-01-T-SH, Pitch="2.54 mm", RoHS=True
Q1: library part CMP-1099-00030-1, "P-Channel OptiMOS P3 Small-Signal-Transistor, -30 V VDS, -2 A ID, -55 to 150 degC, PG-SOT23, Reel, Green", Manufacturer=Infineon, ComponentLink1Description="Manufacturer URL", ComponentLink1URL=http://www.infineon.com/, ComponentLink2Description=Datasheet, ComponentLink2URL=http://www.infineon.com/dgdl/BSS308PE_Rev23_.pdf?folderId=db3a304314dca38901154a72e3951a65&fileId=db3a304330f686060131099c80400073, ComponentLink3Description="Package Specification", ComponentLink3URL=http://www.infineon.com/dgdl/SOT23-Package_Overview.pdf?folderId=db3a30431936bc4b0119532290053c66&fileId=db3a30431936bc4b0119533468123c85, DatasheetVersion="Rev. 2.03", Green=TRUE, Halogen-free=TRUE, ID (max)="-2Â A", IDpuls (max)="-8Â A", Mounting Technology="Surface Mount", PackageDescription="3-Pin Small Outline Transistor Package, 2.9 x 1.3 mm Body, 0.95 mm Pitch", PackageReference=PG-SOT23, PackageVersion=Apr-08, Packing=Reel, PartNumber=BSS308PE, Pto t (max)="0.5Â W", QG="-5Â nC", RDS (on) (max)="80Â mOhm", RDS (on) (max) (@4.5V)="130Â mOhm", Rth="250Â K/W", VDS (max)="-30Â V", VGS(th) (max)="-1Â V", VGS(th) (min)="-2Â V"
Q2: library part CMP-02550-000257-1, "MOSFET N-CH 60V 2A SOT23-3"
R1 R2 R3 R4 R5 R6 R7 R8 R9 R10 R11 R12 R14 R15 R16 R17 R18 R19 R20 R21 R22 R23 R? R?: library part CMP-1666-00005-4, "Chip Resistor, 10 KOhm, +/- 1%, 100 mW, -55 to 155 degC, 0603 (1608 Metric), RoHS, Tape and Reel", Manufacturer="Vishay Semiconductor", Max Operating Temperature="155 degC", Min Operating Temperature="-55 degC", Package Quantity=5000, Voltage Rating="75 V", ComponentLink1Description="Manufacturer URL", ComponentLink1URL=http://www.vishay.com/, ComponentLink2Description=Datasheet, ComponentLink2URL=https://datasheet.ciiva.com/11809/0900766b80d98afc-11809037.pdf, DatasheetVersion=06/2012, Height="0.45 mm", Length="1.55 mm", Mounting Technology="Surface Mount", PackageDescription="2-Pin Surface Mount Device, Body 1.575 x 0.85 mm", PackageReference=0603, Packaging="Tape and Reel", REACH SVHC=Unknown, RoHSCompliant=true
SW1: library part CMP-2000-07501-1, "FSMSM Push Button Switch, 50 mA, -35 to 85 degC, 2-Pin SMD, RoHS, Tape and Reel", Case\/Package=SMD/SMT, Contact Current Rating=50mA, Contact Resistance=100mOhm, Manufacturer="TE Connectivity", Max Operating Temperature=85degC, Max Voltage Rating (DC)=12V, Min Operating Temperature=-35degC, Operating Force=180gf, Package Description="2-Pin Surface Mount Device, Body 6 x 3.5 mm, Pitch 9.19 mm", Package Quantity=1800, Voltage Rating (DC)=24V, Actuator Length=1.07mm, Actuator Material=Polyamide, Contact Material=Brass, Contact Plating=Silver, Current Rating=50mA, Datasheet URL=http://www.te.com/commerce/DocumentDelivery/DDEController?Action=showdoc&DocId=Customer+Drawing%7F1437566-3%7FC2%7Fpdf%7FEnglish%7FENG_CD_1437566-3_C2_1437566_3_1_c.dwg.pdf%7F1437566-4, Datasheet Version="Rev. C2, 08/2014", Electrical Life=20000Cycles, ELV=Compliant, Illumination Type=Illuminated, Lead Free=LeadFree, Manufacturer URL=http://www.te.com/, Mechanical Life=20000Cycles, Mount=SurfaceMount, Mounting Technology=SurfaceMount, Orientation=Straight, Package Reference=FSMSMTR, Packaging=TapeandReel, REACH SVHC=Unknown, RoHSCompliant=true, Switch Travel=0.25mm, Termination=GullWing, Throw Configuration=SPST
SW2: "No Description Available", Mfr_Name="NKK Switches", Copyright="Copyright (C) 2024 Ultra Librarian. All rights reserved.", Manufacturer_Part_Number=A11JP, RefDes=RefDes, Type=DEV
SW3: library part CMP-17879-000010-1, "SWITCH TACTILE SPST-NO 50MA 12V", Max Operating Temperature=70°C, Min Operating Temperature=-20°C, Operating Force=260gf, Actuator Type=Standard, Illumination Type=Non-Illuminated, Lead Free="Lead Free", Mechanical Life=200000Cycles, Mount="Surface Mount", Packaging="Tape and Reel", Switch Function=Off-Mom, Switch Travel=0.2mm, Termination="Gull Wing", Throw Configuration=SPST
U1: library part CMP-0243-00136-1, "ARM Cortex-M4 32-bit MCU+FPU, 128 KB Flash, 64 KB Internal RAM, 36 I/Os, 48-Pin UFQFPN, -40 to 85 degC, Tape and Reel", I/Os (High Current)=36, Manufacturer=STMicroelectronics, Operating Frequency(F) (Processor speed) (MHz)=84, Package Description=UFQFPN48, Package Reference="48-Pin Ultra Thin Fine Pitch Quad Flat No-Lead, 7 x 7 x 0.6 mm Body, 0.5 mm Pitch, Exposed Pad", Supply Voltage(Vcc) min (V)=1.7, ComponentLink1Description="Manufacturer URL", ComponentLink1URL=http://www.st.com/, ComponentLink2Description=Datasheet, ComponentLink2URL=http://www.st.com/st-web-ui/static/active/en/resource/technical/document/datasheet/DM00086815.pdf, Core="ARM Cortex-M4", DatasheetVersion="Rev. 5", FLASH Size (Prog) (kB)=128, Internal RAM Size (kB)=64, Manufacturer Part Number=STM32F401CBU6TR, Mounting Technology="Surface Mount", Packing="Tape and Reel"
U2: "Fixed Positive LDO Regulator, 3.3V, 1.2V Dropout, BIPolar, PDSO4", Case/Package=SOP, Dropout Voltage1-Max=1.2V, Dropout Voltage1-Nom=1.1V, Input Voltage Absolute-Max=15V, Manufacturer=STMicroelectronics, Min Input Voltage=4.75V, Operating Temperature, TJ-Max=125°C, Operating Temperature, TJ-Min=0°C, Output Current1-Max=1.3A, Output Voltage1-Max=3.365V, Output Voltage1-Min=3.235V, Output Voltage1-Nom=3.3V, Package Body Material=Plastic, Package Shape=Rectangular, Package Style="SMALL OUTLINEMeter", Peak Reflow Temperature (Cel)=260°C, Supplier Part Number=511-LD1117S33, Time @ Peak Reflow Temperature-Max (s)=30s, Voltage Tolerance-Max=2%, Adjustability=FIXED, Category="Voltage Regulators - Linear", Channels=1, ComponentLink1Description=https://datasheet.ciiva.com:443/pdfs/VipMasterIC/IC/SGST/SGST-S-A0009691890/SGST-S-A0009691890-1.pdf?src-supplier=IHS+Markit, ComponentLink1URL=https://datasheet.ciiva.com:443/pdfs/VipMasterIC/IC/SGST/SGST-S-A0009691890/SGST-S-A0009691890-1.pdf?src-supplier=IHS+Markit, ComponentLink2Description=https://datasheet.ciiva.com/19478/1390240-19478097.pdf?src-supplier=Jameco, ComponentLink2URL=https://datasheet.ciiva.com/19478/1390240-19478097.pdf?src-supplier=Jameco, ComponentLink3Description=https://datasheet.ciiva.com/1511/1776449-1511573.pdf?src-supplier=Element14, ComponentLink3URL=https://datasheet.ciiva.com/1511/1776449-1511573.pdf?src-supplier=Element14, ComponentLink4Description=https://datasheet.ciiva.com/7992/1776449-7992621.pdf?src-supplier=Element14, ComponentLink4URL=https://datasheet.ciiva.com/7992/1776449-7992621.pdf?src-supplier=Element14, ComponentLink5Description=https://datasheet.ciiva.com/28652/1776449-28652462.pdf?src-supplier=Element14, ComponentLink5URL=https://datasheet.ciiva.com/28652/1776449-28652462.pdf?src-supplier=Element14, ComponentLink6Description=https://datasheet.ciiva.com/2041/cd00000544-2041942.pdf?src-supplier=Digi-Key, ComponentLink6URL=https://datasheet.ciiva.com/2041/cd00000544-2041942.pdf?src-supplier=Digi-Key, ComponentLink7Description=https://datasheet.ciiva.com/2041/cd00000544-2041941.pdf?src-supplier=Digi-Key, ComponentLink7URL=https://datasheet.ciiva.com/2041/cd00000544-2041941.pdf?src-supplier=Digi-Key, ComponentLink8Description=https://datasheet.ciiva.com/2041/cd00000544-2041943.pdf?src-supplier=Digi-Key, ComponentLink8URL=https://datasheet.ciiva.com/2041/cd00000544-2041943.pdf?src-supplier=Digi-Key, ComponentLink9Description=https://datasheet.ciiva.com/16396/cd00000544-16396459.pdf?src-supplier=Future+Electronics, ComponentLink9URL=https://datasheet.ciiva.com/16396/cd00000544-16396459.pdf?src-supplier=Future+Electronics, Height - Seated (Max)=1.9mm, JESD-30 Code=R-PDSO-G3, JESD-609 Code=e3, Length=6.5mm, Line Regulation-Max=0.006%, Load Regulation-Max=0.01%, Manufacturer Part Number=LD1117S33TR, Max Supply Voltage=15V, Moisture Sensitivity Level=1, Number of Outputs=1, Packaging="Tape and Reel", Pins=3, Pricing="1=0.64, 10=0.53, 50=0.53, 100=0.386, 1000=0.291, 10000=0.229 (USD)", Qualification Status="Not Qualified", Reach SVHC Compliant=No, Regulator Type="FIXED POSITIVE SINGLE OUTPUT LDO REGULATOR", RoHS=Yes, RoHS Compliant=Yes, Stock=175247, Supplier=Mouser, Surface Mount=Yes, Technology=BIPOLAR, Terminal Finish=Tin, Terminal Form="Gull Wing", Terminal Pitch=2.3mm, Terminal Position=DUAL, Width=3.5mm
U3: "No Description Available", Mfr_Name=STMicroelectronics, Copyright="Copyright (C) 2023 Ultra Librarian. All rights reserved.", Manufacturer_Part_Number=USBLC6-2SC6, RefDes=RefDes, Type=DEV
Y1: library part CMP-27762-006537-2, "Crystal 16MHz ±20ppm (Tol) ±30ppm (Stability) 18pF FUND 80Ω 4-Pin SMD T/R", Case/Package=CSMD, ESR (Equivalent Series Resistance)=80R, Frequency=16MHz, Frequency Stability=30ppm, Frequency Tolerance=20ppm, Load Capacitance=18pF, Max Operating Temperature=85°C, Min Operating Temperature=-40°C, Operating Frequency="16 MHz", Package Quantity=1000, Depth=2.5mm, Height=1mm, Lead Free="Lead Free", Length=3.2mm, Mount="Surface Mount", Number of Pins=4, Packaging="Tape and Reel", Radiation Hardening=No, Series=ABM8G, Series Resistance=80R, Termination=SMD/SMT, Tolerance=20ppm, Width=2.5mm
Y2: library part CMP-27762-000994-1, "Crystal 27.12MHz ±30ppm 18pF SMD-4 3.2mm x 2.5mm", Capacitance=1.8E-11F, Case/Package=SMD/SMT, ESR (Equivalent Series Resistance)=50R, Frequency=27.12MHz, Frequency Stability=50ppm, Frequency Tolerance=30ppm, Load Capacitance=18pF, Max Operating Temperature=70°C, Min Operating Temperature=-20°C, Height=0.031inch, Lead Free="Lead Free", Length=0.126inch, Mount="Surface Mount", Packaging="Tape and Reel", RoHS Compliant=Yes, Width=0.098inch

## Via types
v1: diameter 0.6, hole 0.3, Top Layer to Bottom Layer, 65 vias
v2: diameter 0.5, hole 0.2, Top Layer to Bottom Layer, 34 vias
v3: diameter 1.2, hole 0.68, Top Layer to Bottom Layer, 2 vias

## Nets (pads, with @x,y where several pads share a name; then routed paths per layer and width w, separated by ;. In a path a pad name is that pad's centre, name@x,y a point inside that pad or via, vN(x,y) a via of type N, cw(c..) or ccw(c..) an arc to the next point about the centre after c; other vN are vias at no path point)
3V3: C3.2 C4.1 C5.1 C6.1 C15.1 C16.1 C17.1 C32.2 C33.2 C34.2 C35.2 C36.1 C37.1 C38.1 D7.2 J2.10 J2.12 LS1.2 P1.1 R3.2 R4.1 R5.2 R6.2 R7.2 R10.2 R23.2 R?.2 U1.1 U1.9 U1.24 U1.36 U1.48 U2.2 U2.4 U4.8 U5.1 U5.2 U5.3 U5.12 U5.15 | length 61.6
  Top Layer w0.15: v1(82.521,80.645) 82.538,80.661 82.538,81.633 U5.12
  Top Layer w0.254: U5.15 84.054,81.353 84.152,81.255 84.152,81.109 84.314,80.947 84.567,80.947 84.869,80.645 v1(84.963,80.645)
  Bottom Layer w0.15: v1(79.502,85.09) 79.523,85.069 79.523,83.723 82.521,80.725 v1(82.521,80.645) C35.2@82.521,79.058 ; C33.2 C35.2
  Bottom Layer w0.254: v1(69.596,90.678) R5.2 70.851,90.603 71.528,89.926 72.856,89.926 73.533,90.603 73.855,90.281 P1.1 ; R7.2 C36.1 ; C37.1 C36.1 ; v1(76.327,102.108) 74.616,102.108 U4.8 74.549,104.538 75.092,105.081 C36.1 ; v1(79.121,96.012) 79.121,101.219 v1@78.65,101.69 ; C6.1 79.953,102.414 79.705,102.166 79.63,102.166 79.257,101.793 78.679,101.793 v1(78.613,101.727) v1@78.65,101.69 ; C35.2 82.585,79.069 83.464,79.948 84.266,79.948 v1(84.963,80.645) ; C16.1 C15.1 ; J2.12 86.64,109.773 86.64,110.262 86.478,110.424 85.892,110.424 85.73,110.262 85.73,109.773 J2.10 85.685,108.924 85.606,108.845 85.606,108.325 85.685,108.246 85.685,107.477 84.455,106.247 C17.1 84.437,106.154 84.437,104.031 C15.1 ; v1(88.138,95.758) v1(88.138,100.076) ; v1(92.837,105.791) R10.2 ; v1@78.65,101.69 81.461,101.69 83.021,101.69 84.42,103.089 C15.1
ANT1: *.2 C24.2 C25.2 C27.2 | length 12.7
  Top Layer w1: *.2 74.514,69.342 C24.2 76.362,71.12 C27.2
  other v3: 80.518,29.464 84.201,33.401
ANT2: *.1 C20.2 C22.1 C23.1 R11.2 | length 26
  Top Layer w1: C20.2 C22.1 C23.1 90.205,69.342 ; R11.2 93.741,72.878 90.205,69.342 ; *.1 90.205,69.342
BAT+: C30.1 Q1.2 R14.2 R15.2 SW2.3 U6.10 | length 25.8
  Top Layer w0.2: U6.10 76.175,108.369 77.252,109.446 C30.1
  Top Layer w0.5: Q1.2 78.835,113.096 77.899,112.16 77.235,112.16 v1(77.216,112.141) 77.216,112.114 77.252,112.078 C30.1 77.259,110.389 79.057,110.389 R14.2 79.073,110.389 81.09,110.389 R15.2
  Bottom Layer w0.5: SW2.3 68.187,109.462 74.537,109.462 v1(77.216,112.141)
BAT_CONN: J3.1 SW2.1 | length 12.7
  Top Layer w0.5: SW2.1 64.516,116.713 J3.1
BUTTON: R23.1 SW3.1 SW3.2 U1.11 | length 18.3
  Top Layer w0.254: U1.11 86.616,101.165 87.058,101.165 87.569,101.677 87.569,102.213 90.116,104.76 R23.1 92.912,104.76 94.362,106.21 94.506,106.21 SW3.2 SW3.1
BUZZ: R21.2 U1.12 | length 27.7
  Top Layer w0.254: R21.2 v1(76.073,94.996) ; U1.12 86.614,102.616 86.794,102.796 86.888,102.796 87.155,103.063 v1(87.249,103.063)
  Bottom Layer w0.254: v1(76.073,94.996) 76.446,94.623 84.115,94.623 87.249,97.757 v1(87.249,103.063)
CLK: U1.21 U4.6 | length 13.9
  Top Layer w0.254: v1(72.009,103.759) 75.666,103.759 76.774,104.867 80.338,104.867 80.653,104.552 80.653,104.007 81.085,103.576 81.507,103.576 81.939,103.144 U1.21
  Bottom Layer w0.254: U4.6 v1(72.009,103.759)
CS_MEM: R6.1 U1.29 U4.1 | length 11.7
  Top Layer w0.254: v1(78.486,99.187) 78.58,99.187 78.834,99.441 79.1,99.441 79.32,99.661 79.762,99.661 U1.29
  Bottom Layer w0.254: R6.1 74.833,93.767 74.549,94.051 U4.1 74.549,94.551 76.533,96.535 76.533,97.163 78.486,99.116 v1(78.486,99.187)
CS_OLED: J2.9 R10.1 U1.14 | length 17.3
  Top Layer w0.254: v1(84.963,107.95) 84.963,107.939 85.439,107.463 U1.14
  Bottom Layer w0.254: v1(84.963,107.95) 84.963,109.017 85.14,109.194 85.14,109.436 85.185,109.481 J2.9 85.23,109.773 85.23,110.404 85.704,110.878 86.666,110.878 87.12,110.424 90.572,110.424 92.762,108.234 R10.1
DC_OLED: J2.7 U1.19 | length 9.7
  Top Layer w0.254: U1.19@82.941,102.34 U1.19 82.939,103.204 81.629,104.514 81.629,106.521 v1(83.058,107.95)
  Bottom Layer w0.254: v1(83.058,107.95) 83.818,107.95 83.953,108.085 84.072,108.085 84.439,108.452 84.439,108.972 84.23,109.181 84.23,109.683 J2.7
GND: C1.2 C2.2 C3.1 C4.2 C5.2 C6.2 C7.1 C8.2 C9.2 C10.2 C13.1 C15.2 C16.2 C17.2 C18.2 C19.2 C21.2 C22.2 C23.2 C24.1 C25.1 C26.1 C29.1 C30.2 C31.2 C32.1 C33.1 C34.1 C35.1 C36.2 C37.2 C38.2 D1.2 D2.2 J1.5 J2.1 J2.11 J3.3 P1.3 Q2.2 R1.2 R8.2 R9.2 R16.1 R17.1 R18.1 R19.1 R20.1 R22.1 SW1.2 SW3.3 SW3.4 U1.8 U1.23 U1.35 U1.47 U1.49 U2.1 U3.2 U4.4 U5.4 U5.5 U5.10 U5.14 U5.28 U5.29 U5.30 U5.32 U6.3 U6.7 Y1.2 Y1.4 Y2.2 Y2.4 | length 123.6
  Top Layer w0.2: v1(70.854,106.792) 72.461,106.792 73.238,107.569 U6.3 ; U6.7 76.619,107.169 76.981,106.807 v1(77.089,106.807)
  Top Layer w0.254: v1(64.643,91.821) 64.656,91.808 66.091,91.808 Q2.2 ; v1(64.643,94.996) R22.1@66.025,94.996 ; C32.1 77.302,84.322 80.377,84.322 U5.4 U5.5 ; v1(78.631,102.888) 78.631,104.122 C1.2 ; U1.35 80.939,96.663 v2(80.989,96.713) ; v1(80.391,80.01) 80.454,80.01 81.089,80.645 v1(81.153,80.645) 81.153,80.739 81.461,81.047 81.461,81.114 81.552,81.205 81.552,81.647 U5.10 ; U1.23 80.939,101.163 v2(80.989,101.113) ; v1(81.026,87.503) 81.052,87.477 81.052,86.501 U5.32 ; U5.30 U5.29 ; v1(82.55,87.63) 82.552,87.628 82.552,86.501 U5.29 ; U5.28 U5.29 ; v1(83.185,112.268) 84.058,112.268 85.501,110.824 85.501,109.317 v1(86.233,108.585) ; U5.14 83.556,81.647 83.556,81.139 83.698,80.997 83.698,80.894 v1@83.947,80.645 ; v1(83.775,80.599) 83.821,80.645 v1@83.947,80.645 ; v2(85.389,96.713) 85.439,96.663 U1.47 ; v2(85.389,100.013) 85.739,99.663 U1.8 ; C29.1 91.024,78.792 90.372,78.14 85.944,78.14 v1(85.09,78.994) 84.013,80.071 84.013,80.579 v1@83.947,80.645
  Top Layer w0.5: v1(65.405,100.711) U3.2 ; v1(70.854,104.767) 71.874,104.767 R18.1 ; v1(70.923,108.258) 70.942,108.277 71.342,108.277 71.657,108.592 71.732,108.592 R17.1 ; v1(73.787,116.078) R19.1 75.169,116.153 R19.1@75.019,116.303 ; v1(75.184,112.268) 75.175,112.277 74.137,112.277 R20.1 74.102,112.262 74.102,110.407 C31.2 C30.2 ; C24.1 C25.1 78.74,74.693 80.553,76.506 C26.1 ; C38.2 77.789,97.374 77.824,97.409 v1(77.851,97.409) ; R16.1 76.955,78.59 76.955,78.449 78.823,76.581 C26.1 ; v1(77.216,83.439) C32.1 ; C34.1 v1(77.216,89.281) ; v1(80.391,80.01) 80.391,79.983 80.553,79.821 C26.1 ; v1(81.661,118.745) 81.661,118.772 81.724,118.835 J1.5 ; v1(85.09,78.994) 85.09,78.967 84.547,78.424 C21.2 84.547,76.506 85.979,75.074 C22.2 C23.2 ; C4.2 86.096,93.066 86.096,91.084 R1.2 86.113,91.051 86.113,89.796 v1(86.106,89.789) ; C5.2 88.664,102.055 90.787,102.055 C10.2 v1(90.805,103.251) ; Y2.4 90.297,84.58 91.772,86.055 91.772,86.48 Y2.2 92.061,86.769 92.061,87.997 v1(92.075,88.011) ; Y1.4 92.112,94.537 92.112,92.708 C9.2 92.237,90.994 92.202,90.959 v1(92.202,90.932) ; Y1.2 93.648,98.739 93.402,98.985 C8.2 v1(94.996,99.06) ; D1.2 94.113,121.914 96.006,121.914 D2.2 96.018,121.914 97.403,121.914 v1(97.409,121.92) ; C18.2 v1(96.266,82.931) ; C19.2 v1(96.266,88.265) ; v1(95.123,102.108) 95.123,102.135 95.079,102.179 SW3.4 SW3.3 ; U2.1 97.42,110.356 99.815,110.356 C3.1 v1(99.949,109.347) ; C2.2 101.411,113.573 101.446,113.538 v1(101.473,113.538) ; SW1.2 100.226,91.567 v1(102.108,91.567)
  Bottom Layer w0.254: C33.1 79.664,79.069 80.325,79.73 80.325,79.944 v1(80.391,80.01) ; C6.2 81.153,102.564 C6.2@81.401,102.812 ; C35.1@83.794,79.003 C35.1 v1(85.09,78.994) ; J2.11 86.185,108.633 v1(86.233,108.585)
  other v2: 82.089,96.713 83.189,96.713 84.289,96.713 80.989,97.813 82.089,97.813 83.189,97.813 84.289,97.813 85.389,97.813 80.989,98.913 82.089,98.913 83.189,98.913 84.289,98.913 85.389,98.913 80.989,100.013 82.089,100.013 83.189,100.013 84.289,100.013 82.089,101.113 83.189,101.113 84.289,101.113 85.389,101.113
MAIN_RAIL: C2.1 D5.2 D6.2 R2.2 U2.3 | length 21.3
  Top Layer w0.254: R2.2@94.043,117.65 R2.2 94.182,117.714 94.455,117.441 94.455,117.078 96.711,114.822 U2.3
  Top Layer w0.5: D5.2 87.471,114.014 D6.2 89.694,114.046 90.446,114.797 100.051,114.797 C2.1
MFRC_IRQ: U1.40 U5.23 | length 13.2
  Top Layer w0.254: v1(81.812,93.853) 81.812,93.947 81.939,94.074 U1.40 ; U5.23 85.231,85.326 85.673,85.326 86.614,86.267 v1(86.614,86.36)
  Bottom Layer w0.254: v1(81.812,93.853) 82.853,92.812 83.083,92.812 84.201,91.694 84.201,88.773 v1(86.614,86.36)
MFRC_NRST: U1.41 U5.6 | length 15.3
  Top Layer w0.254: v1(79.121,83.312) 79.131,83.322 80.377,83.322 U5.6 U5.6@80.377,83.326 ; v1(81.915,92.329) 82.439,92.853 U1.41
  Bottom Layer w0.254: v1(79.121,83.312) 79.121,84.457 78.494,85.084 78.494,88.908 v1(81.915,92.329)
MFRC_ON: U1.39
MFRC_OSCIN: C18.1 U5.21 Y2.1 | length 10.1
  Top Layer w0.254: U5.21 87.987,84.324 88.783,83.528 91.245,83.528 Y2.1@92.047,84.33 ; Y2.1 Y2.1@92.047,84.33 ; C18.1 93.888,83.006 93.64,83.254 93.248,83.254 92.57,83.932 92.445,83.932 Y2.1@92.047,84.33
MFRC_OSCOUT: C19.1 U5.22 Y2.3 | length 10.6
  Top Layer w0.254: U5.22 86.746,84.824 88.678,86.755 Y2.3 90.297,86.88 91.448,88.031 91.448,88.271 91.815,88.638 92.541,88.638 92.914,88.265 C19.1
MFRC_SCL: R?.1@80.279,89.154 U1.42 U5.31 | length 11.5
  Top Layer w0.254: R?.1@80.279,89.154 81.216,89.154 81.889,88.481 ; U5.31 81.556,86.501 81.556,87.146 81.889,87.479 81.889,88.481 ; U1.42 82.939,89.531 81.889,88.481
MFRC_SDA: R?.1@87.216,88.224 U1.43 U5.24 | length 13.3
  Top Layer w0.254: U1.43 83.439,91.174 85.229,89.384 85.229,86.237 ; U5.24 85.229,86.237 ; R?.1@87.216,88.224 87.216,88.149 86.123,87.056 86.048,87.056 85.229,86.237
MISO: U1.27 U4.2 | length 9.8
  Top Layer w0.254: v1(78.486,100.584) 78.58,100.584 78.659,100.663 U1.27
  Bottom Layer w0.254: U4.2 73.279,94.551 77.859,99.131 77.859,99.957 v1(78.486,100.584)
MOSI: U1.28 U4.5 | length 12.4
  Top Layer w0.254: v1(70.739,103.759) 74.335,100.163 78.02,100.163 78.226,99.957 78.746,99.957 78.952,100.163 U1.28
  Bottom Layer w0.254: U4.5 v1(70.739,103.759)
NetC1_1: C1.1 U1.22 | length 2.6
  Top Layer w0.254: C1.1 79.848,104.065 80.848,103.065 81.154,103.065 81.437,102.782 81.437,102.34 U1.22
NetC7_2: C7.2 J2.2 | length 3.7
  Bottom Layer w0.254: C7.2 81.28,107.898 81.523,108.141 81.523,108.586 81.685,108.748 J2.2
NetC11_1: C11.1 J2.13 | length 4
  Bottom Layer w0.254: C11.1 86.049,107.199 87.185,108.335 J2.13
NetC11_2: C11.2 J2.14 | length 3.7
  Bottom Layer w0.254: C11.2 87.249,107.757 87.685,108.193 J2.14
NetC12_1: C12.1 J2.15 | length 3.9
  Bottom Layer w0.254: J2.15 88.185,108.427 89.062,107.55 C12.1
NetC12_2: C12.2 J2.16 | length 4.2
  Bottom Layer w0.254: J2.16 88.685,108.754 90.262,107.177 C12.2
NetC13_2: C13.2 J2.3 | length 6
  Bottom Layer w0.254: C13.2 81.28,104.392 82.185,105.297 82.185,107.294 81.977,107.502 81.977,108.398 82.185,108.606 82.185,109.638 82.14,109.683 J2.3
NetC20_1: C20.1 C21.1 L1.2 | length 6.2
  Top Layer w1: L1.2 83.312,76.616 C21.1 83.347,72.574 C20.1
NetC26_2: C26.2 C27.1 L2.2 | length 6.5
  Top Layer w1: C27.1 81.915,73.082 L2.2
NetC28_1: C28.1 R12.2 U5.17 | length 4.8
  Top Layer w0.254: U5.17@85.527,82.324 86.399,82.324 87.682,81.041 R12.2 87.899,80.899 C28.1
NetC28_2: C28.2 R11.1 | length 1.5
  Top Layer w0.254: C28.2 R11.1
NetC29_2: C29.2 R12.1 U5.16 | length 6.5
  Top Layer w0.254: U5.16 85.774,81.649 87.682,79.741 R12.1 89.025,79.741 89.824,78.942 C29.2
NetD1_1: D1.1 R2.1 | length 1.4
  Top Layer w0.254: R2.1 D1.1
NetD2_1: D2.1 R3.1 | length 1.4
  Top Layer w0.254: R3.1 D2.1
NetD3_1: D3.1 R14.1 | length 1.3
  Top Layer w0.2: R14.1 79.192,108.97 D3.1
NetD3_2: D3.2 U6.8 | length 3.8
  Top Layer w0.2: U6.8 77.803,107.569 79.042,106.33 D3.2
NetD4_1: D4.1 R15.1 | length 1.4
  Top Layer w0.2: D4.1 80.843,108.828 R15.1
NetD6_1: D6.1 Q1.3 | length 2.3
  Top Layer w0.5: Q1.3 D6.1
NetD7_1: D7.1 LS1.1 Q2.3 | length 7.3
  Top Layer w0.254: Q2.3 LS1.1 71.41,87.221 D7.1
NetJ2_4: J2.4 R8.1 | length 11.7
  Bottom Layer w0.254: J2.4 82.73,109.773 82.73,110.262 85.127,112.658 92.813,112.658 R8.1
NetJ2_8: J2.8 R9.1 | length 9.9
  Bottom Layer w0.254: J2.8 84.712,109.755 84.712,110.528 85.516,111.332 86.854,111.332 87.308,110.878 91.724,110.878 92.762,109.84 R9.1
NetL1_1: L1.1 U5.13 | length 2
  Top Layer w0.254: U5.13 83.056,81.647 83.056,80.997 83.148,80.905 83.148,79.945 L1.1
NetL2_1: L2.1 U5.11 | length 1.9
  Top Layer w0.254: L2.1 81.915,80.365 81.894,80.385 81.894,80.905 82.052,81.062 82.052,81.647 U5.11
NetQ2_1: Q2.1 R21.1 R22.2 | length 3.8
  Top Layer w0.254: R22.2 67.93,93.711 68.008,93.632 Q2.1
NetR1_1: R1.1 U1.44 | length 4.8
  Top Layer w0.254: U1.44 83.939,92.016 84.821,91.134 R1.1
NetR5_1: R5.1 U4.3 | length 3.7
  Bottom Layer w0.254: U4.3 72.009,90.82 R5.1
NetR7_1: R7.1 U4.7 | length 3.5
  Bottom Layer w0.254: R7.1 72.375,105.081 73.279,104.177 U4.7
NetR16_2: R16.2 U5.9 | length 4.4
  Top Layer w0.254: R16.2 78.105,78.815 80.641,81.351 81.052,81.351 81.054,81.353 U5.9
NetR17_2: R17.2 U6.2 | length 2.3
  Top Layer w0.2: R17.2 71.957,107.442 72.484,107.969 U6.2
NetR18_2: R18.2 U6.4 | length 2.7
  Top Layer w0.2: R18.2 72.657,106.06 73.069,106.472 73.069,106.707 73.531,107.169 U6.4
NRST: C10.1 R4.2 SW1.1 U1.7 | length 14.3
  Top Layer w0.254: U1.7 89.055,99.163 90.73,100.838 C10.1 92.822,100.838 R4.2 92.926,100.734 SW1.1
OLED_CLK: J2.6 U1.15 | length 8
  Top Layer w0.254: v1(83.812,108.712) 83.848,108.676 83.848,106.907 83.785,106.844 84.637,105.992 84.637,105.306 84.939,105.004 U1.15
  Bottom Layer w0.254: J2.6 83.69,109.723 83.69,108.928 83.812,108.806 v1(83.812,108.712)
OLED_MOSI: J2.5 U1.17 | length 8.7
  Top Layer w0.254: v1(83.221,107.167) 83.287,107.101 83.287,106.576 83.558,106.305 83.558,106.219 84.183,105.594 84.183,104.236 83.939,103.992 U1.17
  Bottom Layer w0.254: J2.5 83.185,108.928 82.834,108.577 82.798,108.577 82.431,108.21 82.431,107.69 82.888,107.233 83.155,107.233 v1(83.221,107.167)
OSC_IN: C9.1 U1.5 Y1.1 | length 10.7
  Top Layer w0.254: U1.5 88.169,98.163 90.408,95.924 92.525,95.924 93.648,94.801 Y1.1 93.437,94.49 C9.1
OSC_OUT: C8.1 U1.6 Y1.3 | length 8.3
  Top Layer w0.254: U1.6 88.311,98.663 90.073,96.901 Y1.3 91.948,98.102 92.074,98.229 92.074,98.932 C8.1
PG: D4.2 U6.5 | length 7.5
  Top Layer w0.2: U6.5 74.285,106.769 74.285,106.765 75.27,105.78 80.155,105.78 80.693,106.318 D4.2
SWCLK: P1.2 U1.37 | length 14.1
  Top Layer w0.254: v1(80.363,93.734) 80.363,93.828 80.439,93.904 U1.37
  Bottom Layer w0.254: P1.2 74.81,84.963 75.318,85.471 75.318,86.349 76.589,87.62 76.589,90.432 78.207,92.05 78.678,92.05 v1(80.363,93.734)
SWDIO: P1.4 U1.34 | length 21.2
  Top Layer w0.254: v1(75.184,83.693) 75.184,93.025 79.32,97.161 79.762,97.161 U1.34
  Bottom Layer w0.254: P1.4 74.81,79.883 75.946,81.019 75.946,82.949 75.202,83.693 v1(75.184,83.693)
uC_ON: U1.13
USB_CONN_N: J1.2 U3.1 | length 33.3
  Top Layer w0.254: 65.613,103.746 65.613,103.386 65.632,103.367 65.632,102.864 65.781,102.715 65.799,102.715 65.979,102.536 ; 65.979,102.535 66.355,102.159 U3.1 ; v1(83.574,118.294) 83.574,118.388 83.431,118.53 83.431,118.831 83.576,118.976 83.576,119.485 83.601,119.51 83.601,120.109 J1.2
  Bottom Layer w0.254: v1(65.786,104.013) 65.786,104.1 65.069,104.816 64.112,104.816 63.541,105.387 63.541,106.195 68.018,110.671 72.099,110.671 77.407,115.979 77.407,116.572 78.032,117.197 78.032,117.229 78.278,117.475 78.305,117.448 81.291,117.448 81.318,117.421 82.701,117.421 v1(83.574,118.294)
USB_CONN_P: J1.3 U3.3 | length 32.9
  Top Layer w0.254: U3.3 64.455,102.159 64.831,102.535 ; 64.831,102.536 65.011,102.715 65.029,102.715 65.178,102.864 65.178,103.179 65.159,103.198 65.159,103.746 ; v1(82.781,118.399) 82.781,118.492 82.923,118.635 82.923,118.965 83.122,119.164 83.122,119.485 83.097,119.51 83.097,120.109 J1.3
  Bottom Layer w0.254: v1(64.986,104.013) 64.96,104.013 64.664,104.308 63.902,104.308 63.033,105.177 63.033,106.405 67.807,111.179 71.889,111.179 76.899,116.189 76.899,116.782 77.673,117.556 77.673,117.589 78.067,117.983 78.488,117.983 78.515,117.956 81.501,117.956 81.528,117.929 82.287,117.929 82.757,118.399 v1(82.781,118.399)
USB_N: U1.32 U3.6 | length 15.7
  Top Layer w0.15: U3.6 66.355,99.009 65.851,98.505 65.695,98.505 65.607,98.417 65.607,98.293 65.695,98.205 71.682,98.205 71.865,98.388 78.257,98.388 78.53,98.115 79.716,98.115 U1.32
USB_P: U1.33 U3.4 | length 16.4
  Top Layer w0.15: U3.4 64.455,99.009 64.959,98.505 65.115,98.505 65.203,98.417 65.203,98.125 65.528,97.801 71.849,97.801 72.033,97.984 78.089,97.984 78.362,97.711 79.716,97.711 U1.33
V_BUS: C31.1 D5.1 J1.1 Q1.1 R19.2 R20.2 U3.5 U6.1 | length 47.7
  Top Layer w0.2: C31.1@72.877,110.307 73.985,109.199 U6.1
  Top Layer w0.254: C31.1@72.877,110.307 C31.1
  Top Layer w0.5: U3.5 65.405,99.428 65.676,99.699 65.676,99.873 70.104,104.302 70.104,109.489 72.827,112.212 R20.2 ; C31.1 72.852,110.407 72.852,112.262 R20.2 ; Q1.1@78.86,115.046 78.374,115.046 77.342,116.078 R19.2 76.469,116.153 77.86,117.544 83.934,117.544 84.324,117.934 J1.1 ; Q1.1@78.908,114.907 82.944,110.871 D5.1@83.344,110.871 ; Q1.1 78.835,114.996 77.704,113.865 74.264,113.865 73.327,112.928 73.327,112.862 72.827,112.362 R20.2
pads on no net: J1.4 J1.6 J1.7 J1.8 J1.9 J1.10 J1.11 J2.17 J2.18 J3.2 U1.2 U1.3 U1.4 U1.10 U1.16 U1.18 U1.20 U1.25 U1.26 U1.30 U1.31 U1.38 U1.45 U1.46 U4.9 U5.7 U5.8 U5.18 U5.19 U5.20 U5.25 U5.26 U5.27 U5.33 U6.6 U6.9 U6.11
copper on no net:
  other v2: 81.704,82.974 82.804,82.974 83.904,82.974 81.704,84.074 82.804,84.074 83.904,84.074 81.704,85.174 82.804,85.174 83.904,85.174